# EAGLE board AJPIDH (EAGLE 7.5.0)
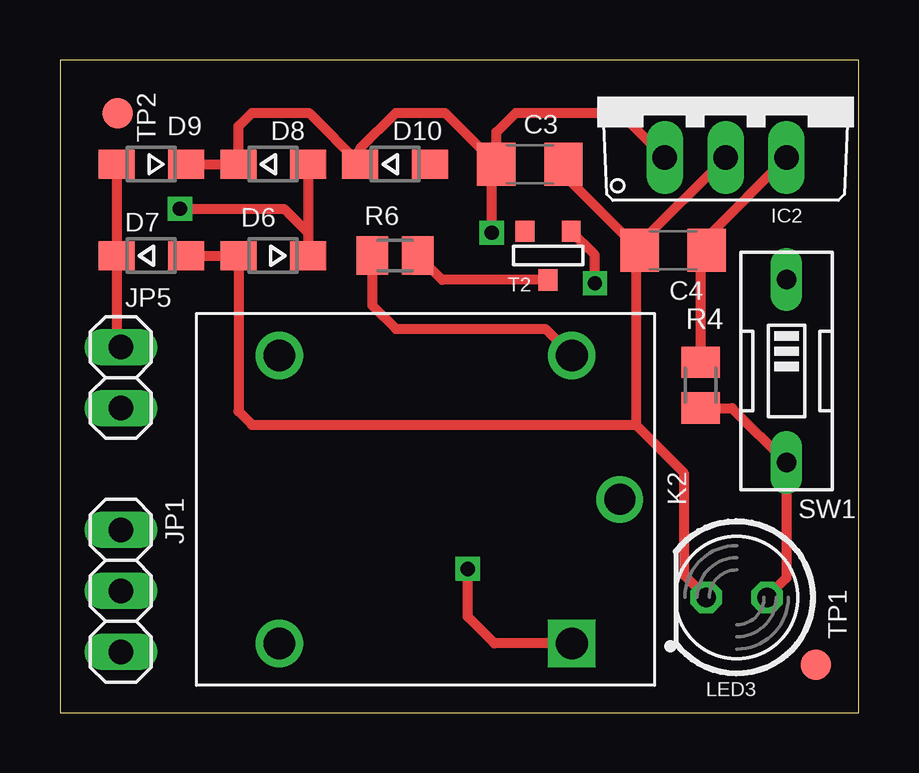
[diagram p0: board, top side]
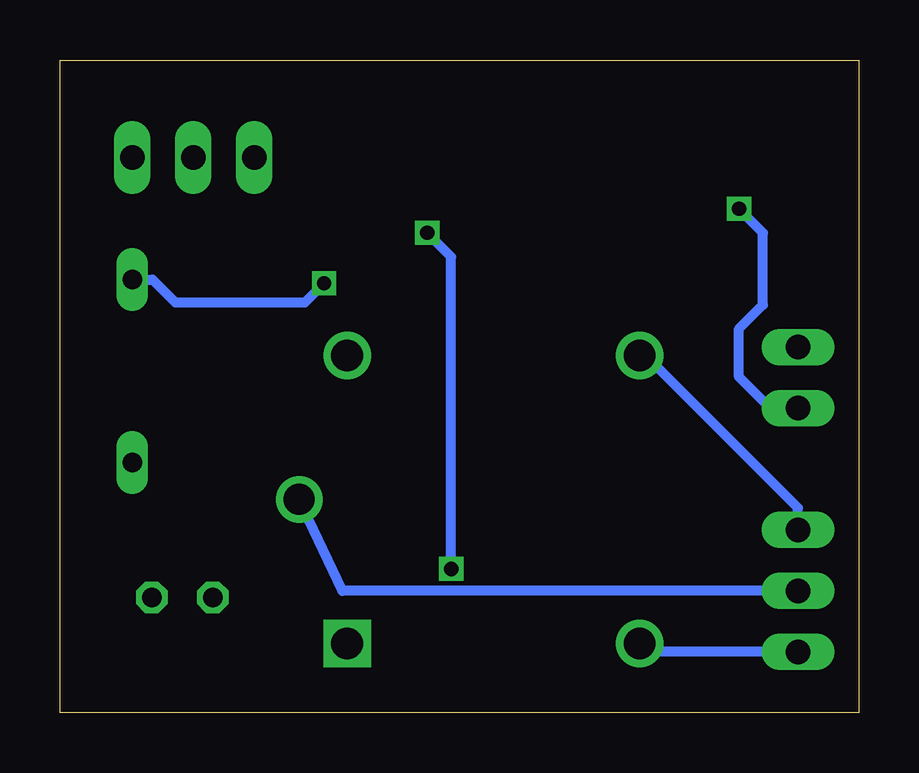
[diagram p1: board, bottom side, seen from below]

Size 33.31 x 27.2 mm. Coordinates in mm from the lower left corner, seen from the top.
Outline: 0,0 33.31,0 33.31,27.2 0,27.2 0,0
Copper layers (1*16): Top 0.035mm / dielectric 1.5mm / Bottom 0.035mm
Design rules "default": minimum track width 10mil, minimum drill 24mil, track to track 8mil, track to pad 8mil, pad to pad 8mil, via to via 8mil, smd to smd 8mil, copper to edge 40mil, drill to drill 8mil, minimum pad ring 10mil, minimum via ring 8mil, stop-mask expansion 4mil, vias tented up to drill 0mil, thermal gap 10mil

## Footprints (pad centres in the part's own frame; a part is rotated, then mirrored left to right if it is on the bottom)
C1206 = smd 1.6 x 1.8: 1 -1.4,0; 2 1.4,0
SOD323-W = smd 1.5 x 1.2: A 1.45,0; C -1.45,0
TO220V = drill 1.016 long: 1 -2.54,-2.54; 2 0,-2.54; 3 2.54,-2.54
1X03 = drill 1.016 long: 1 -2.54,0; 2 0,0; 3 2.54,0
1X02 = drill 1.016 long: 1 -1.27,0; 2 1.27,0
RELAY_SRD-05VDC-SL-C = drill 1.32 square: A1 -6.1,6 | drill 1.32: A2 -6.1,-6; NC 6.1,6; NO 6.1,-6 | drill 1.29: COM -8.1,0
LED5MM = drill 0.813 octagon: A -1.27,0; K 1.27,0
M0805 = smd 1.3 x 1.6: 1 -0.95,0; 2 0.95,0
EDG-01 = drill 0.813 long: 1 0,-3.81; 2 0,3.81
SOT-23 = smd 0.787 x 0.889: 1 0.025,-1.016; 2 -0.94,1.016; 3 0.991,1.016
B1,27 = smd 1.27 x 1.27: TP 0,0

## Placement (x,y rotation side)
C3  470uF/25V  [C1206]  19.59,22.86 0 top
C4  0.1uF  [C1206]  25.56,19.27 180 top
D6  [SOD323-W]  8.89,19.05 180 top
D7  [SOD323-W]  3.81,19.05 0 top
D8  [SOD323-W]  8.89,22.86 0 top
D9  [SOD323-W]  3.81,22.86 180 top
D10  [SOD323-W]  13.97,22.86 0 top
IC2  788TV  [TO220V]  27.75,25.67 0 top
JP1  [1X03]  2.54,5.08 270 top
JP5  12V  [1X02]  2.54,13.97 90 top
K2  SRD-05VDC-SL-C  [RELAY_SRD-05VDC-SL-C]  15.24,8.89 180 top
LED3  blue  [LED5MM]  28.21,4.81 180 top
R4  1K  [M0805]  26.71,13.65 270 top
R6  1k  [M0805]  13.97,19.05 0 top
SW1  [EDG-01]  30.29,14.24 180 top
T2  [SOT-23]  20.32,19.05 0 top
TP1  TPB1,27  [B1,27]  31.51,2.01 180 top
TP2  TPB1,27  [B1,27]  2.41,24.99 0 top

## Library data of the parts
C3 C4 R4 R6 = rcl
D6-D10 = diode
IC2 = linear
JP1 JP5 = pinhead
K2 = SRD-05VDC-SL-C (1); AVAILABILITY: Not in stock; DESCRIPTION: 5V Trigger Relay Module For Arduino And Raspberry Pi 5V Trigger Relay Module For Arduino And Raspberry Pi; MF: Songle Relay; MP: SRD-05VDC-SL-C; PACKAGE: None; PRICE: None
LED3 = led
SW1 = special
T2 = zetex; MPN: DSS20201L-7; OC_FARNELL: 1710688; OC_NEWARK: 25R4555
TP1 TP2 = testpad

## Nets
ADP: C3.1 D8.C D9.C D10.C IC2.1 K2.A1
GND: C3.2 C4.2 D6.A D7.A IC2.2 LED3.K
N$1: K2.A2 R6.1
N$2: SW1.1 T2.3
N$3: R6.2 T2.1
N$4: JP1.1 K2.NO
N$5: JP1.2 K2.COM
N$6: JP1.3 K2.NC
N$13: D6.C D8.A JP5.1
N$15: C4.1 IC2.3 R4.1
N$17: D7.C D9.A JP5.2
N$19: D10.A
PDA: LED3.A R4.2 SW1.2

## Tracks (layer width: path | path; a pad name or v marks a point on that pad's centre or on a via)
ADP  (via drill 0.6)
  Top 0.406: D9.C D8.C 7.44,24.44 8,25 10.38,25 D10.C 12.52,23.52 14,25 16.05,25 C3.1 | C3.1 18.19,24.19 19,25 23.34,25 IC2.1 | K2.A1 18.11,2.89 17,4 v17,6 | v18,20 18,22.67 C3.1
  Bottom 0.406: v17,6 17,19 v18,20
GND
  Top 0.406: D7.A D6.A 7.44,12.56 8,12 24,12 | C4.2 24,19.11 24,12 | C3.2 20.99,22.44 C4.2 | C4.2 24.16,19.54 IC2.2 | 24,12 26,10 26,5.75 LED3.K
N$1
  Top 0.406: R6.1 13.02,16.98 14,16 20.23,16 K2.A2
N$2  (via drill 0.6)
  Top 0.406: T2.3 22.3,19.08 v22.3,17.9
  Bottom 0.406: SW1.1 29.45,18.05 28.5,17.1 23.1,17.1 v22.3,17.9
N$3
  Top 0.406: T2.1 15.94,18.03 R6.2
N$4
  Bottom 0.406: JP1.1 2.54,8.54 9,15 9.03,15 K2.NO
N$5
  Bottom 0.406: JP1.2 21.53,5.08 K2.COM
N$6
  Bottom 0.406: JP1.3 8.79,2.54 K2.NC
N$13  (via drill 0.6)
  Top 0.406: D8.A 10.34,20 | 10.34,20 D6.C | v5,21 9.34,21 10.34,20
  Bottom 0.406: JP5.1 3.7,12.7 5,14 5,16 4,17 4,20 v5,21
N$15
  Top 0.406: R4.1 26.71,19.02 C4.1 26.96,19.8 IC2.3
N$17
  Top 0.406: D9.A D7.C 2.36,15.42 JP5.2
PDA
  Top 0.406: LED3.A 30.29,5.62 SW1.2 28.02,12.7 R4.2